# Altium PCB PCB1 - v1.2.PcbDoc
Units mm, origin at the board's own origin, x right, y up, seen from the top; angles counter-clockwise.
Board outline 84 x 99.75 mm, 2 copper layers (Top Layer, Bottom Layer), stack 1.671 mm thick; 21 components, 32 nets, 137 pads, 15 vias.
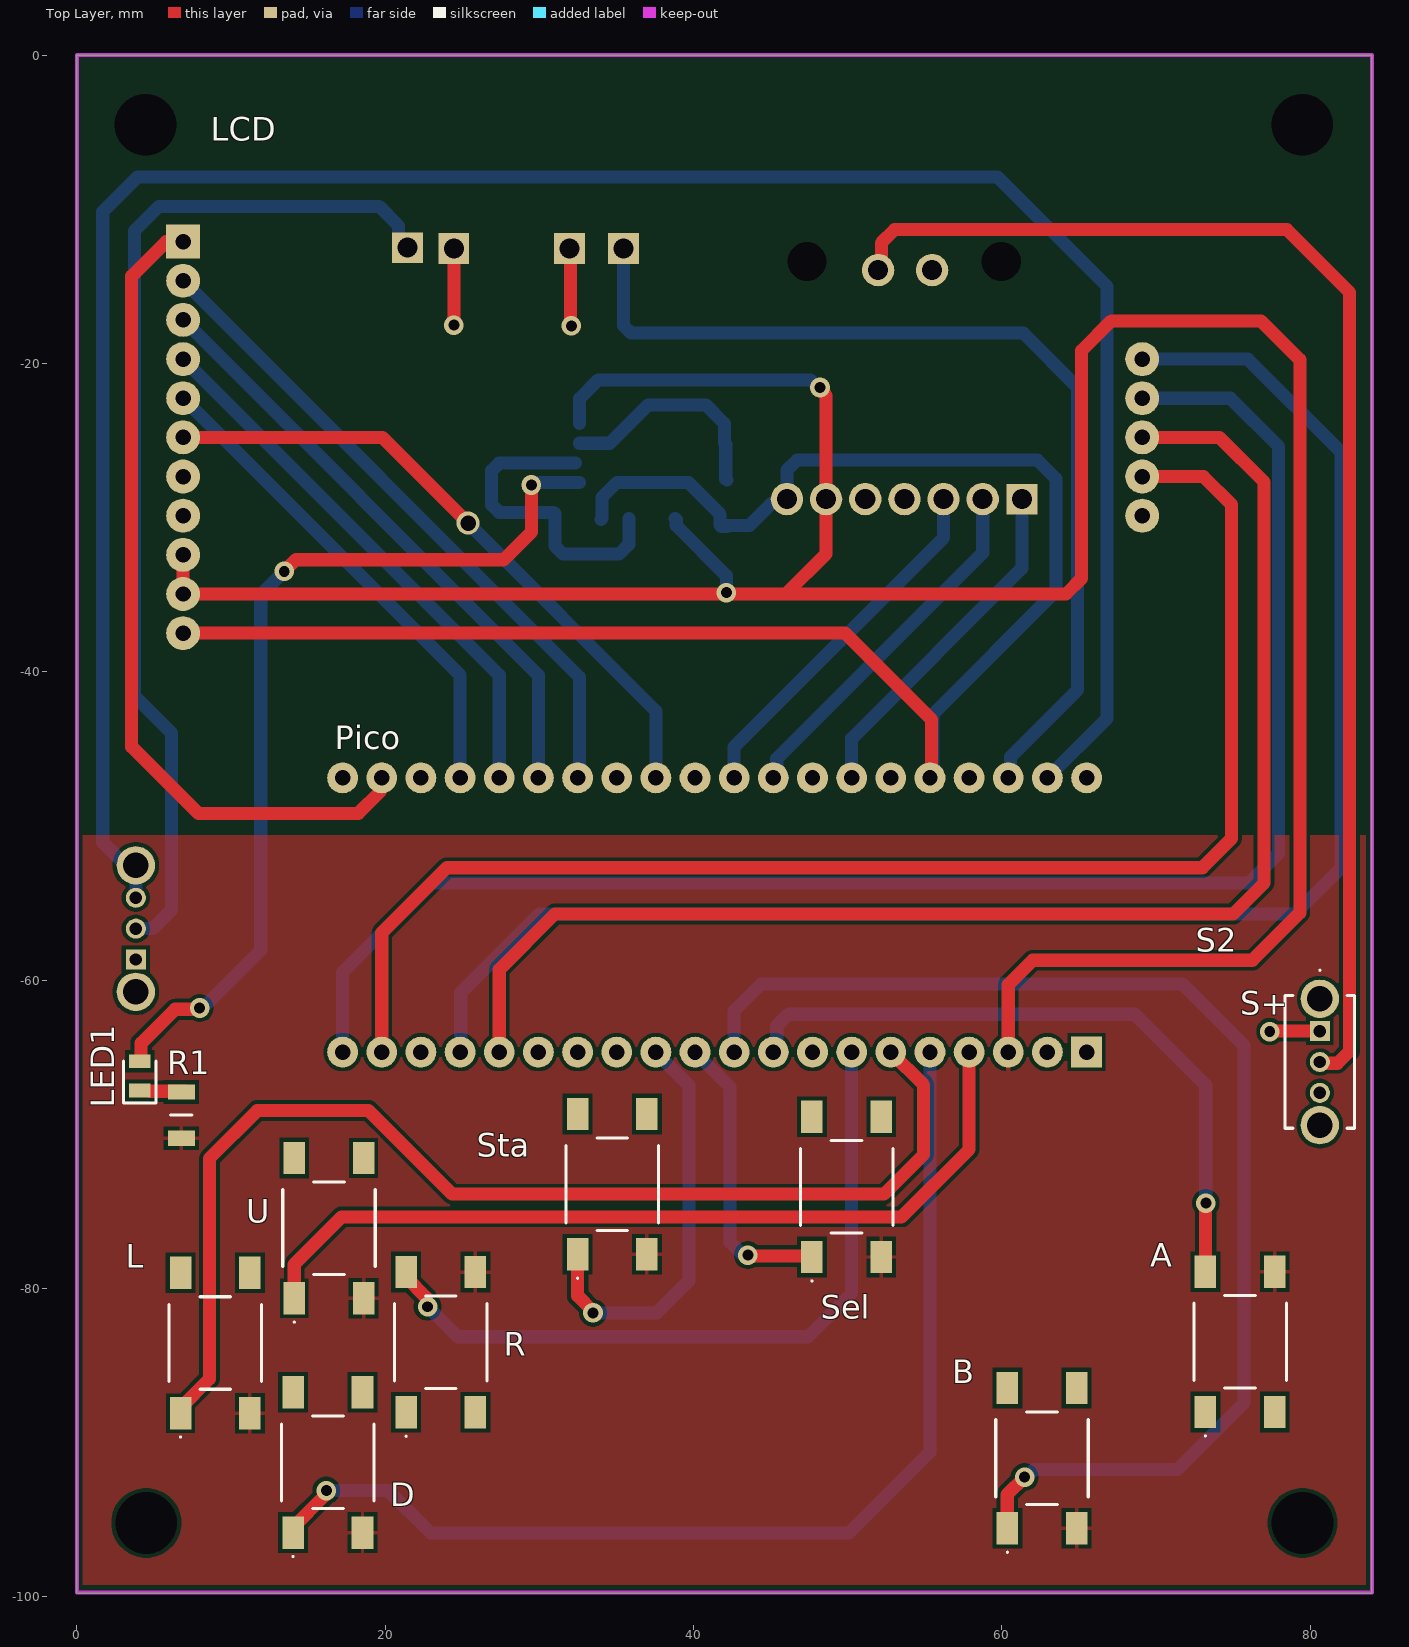
[diagram p0: Top Layer view]
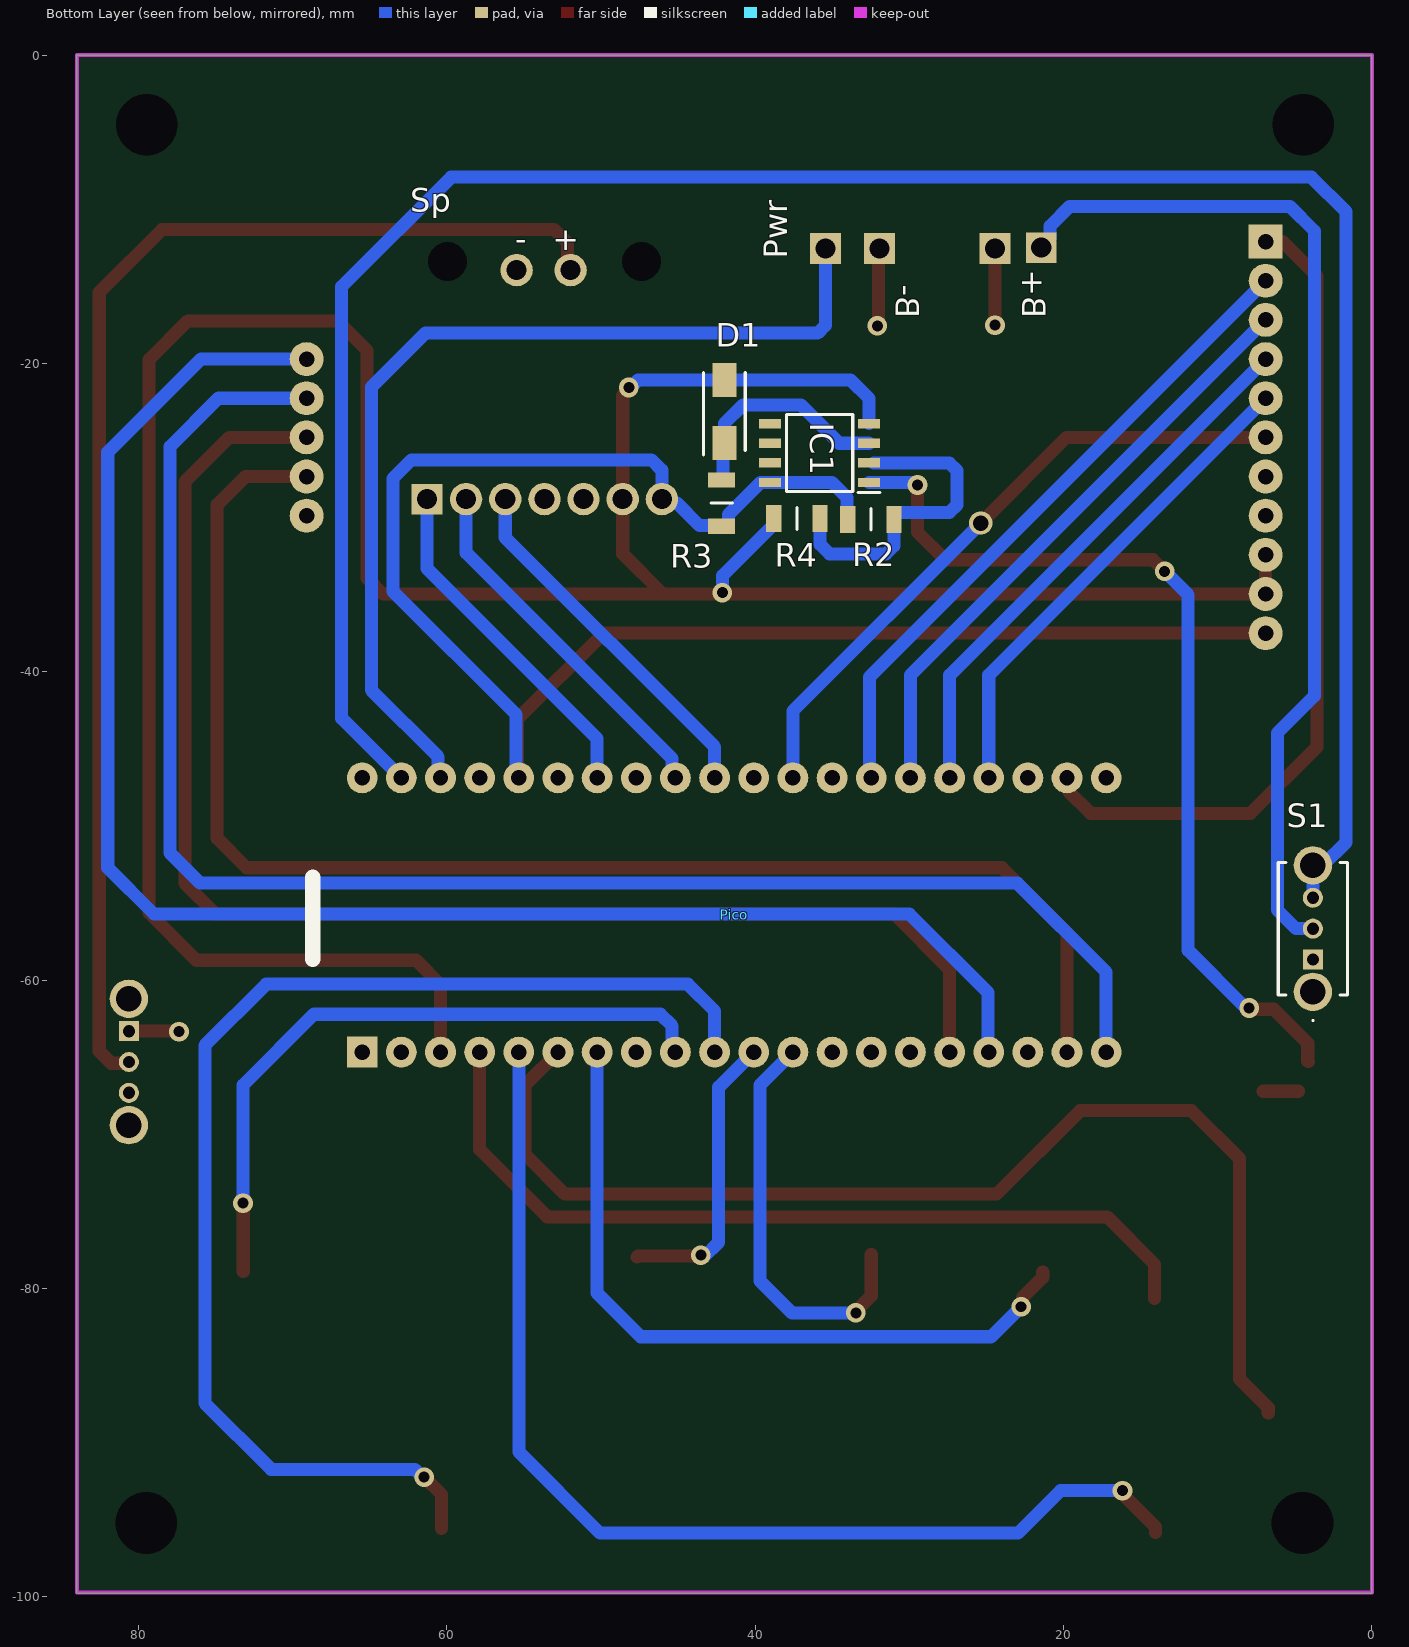
[diagram p1: Bottom Layer view, seen from below]

## Layer stack, top to bottom
Top Solder: solder mask 0.0102, Solder Resist, Dk 3.5
Top Layer: signal copper 0.0356
Dielectric 1: dielectric 1.6, FR-4, Dk 4.8
Bottom Layer: signal copper 0.0356
Bottom Solder: solder mask 0.0102, Solder Resist, Dk 3.5

## Board outline
0,-99.75 84,-99.75 84,0 0,0

## Design rules (kind name [scope] priority, off if disabled: settings)
Clearance [All] p1: gap=0.254 ignorepadtopadclearanceinfootprint=FALSE except(0: Arc-Hole Track-Hole SMDPad-Hole THPad-Hole Via-Hole Fill-Hole Poly-Hole Region-Hole Text-Hole)
PolygonConnect [All] p1: connectstyle=Relief reliefconductorwidth=0.254 reliefentries=4 polygonreliefangle="90 Angle" airgapwidth=0.254
RoutingVias [All] p1: holewidth=0.711 width=1.27 viastyle="Through Hole" minholewidth=0.711 minwidth=1.27 maxholewidth=0.711 maxwidth=1.27
SolderMaskExpansion [All] p1: expansion=0.102 istentingtop=FALSE
Width [All] p1: maxlimit=1.5 minlimit=0.254 preferedwidth=0.7 minimp=50.000000 maximp=50.000000 favimp=50.000000
30 further rules are at their usual default settings.

## Components (designator, comment, footprint, x,y, rotation, side; value= is the part's Value field where it differs from the comment)
A "TS04-66-75-BK-160-SMT" TS046675BK160SMT 75.45,-83.45 r90 top
B "TS04-66-75-BK-160-SMT" TS046675BK160SMT 62.6,-91 r90 top
D "TS04-66-75-BK-160-SMT" TS046675BK160SMT 16.275,-91.275 r90 top
D1 "3.3V" DIOM5027X244N 42,-23.1 r90 bottom
IC1 "NJM4580MD" SOIC127P680X200-8N 35.825,-25.8 r0 bottom
L "TS04-66-75-BK-160-SMT" TS046675BK160SMT 8.975,-83.525 r90 top
LCD "Screen 2.2 - Pins" "LCD 2.2''" 6.89,-12.085 r0 top locked
LED1 "150080SS75000" LEDC2012X80N 4.075,-66.2 r90 top
Pico "Pico - Pins" PICO 65.495,-64.655 r90 bottom locked
Pwr "Charging Module Pico" "Charging Module - Pico" 19.948,-13.981 r270 bottom (schematic designator PWR)
R "TS04-66-75-BK-160-SMT" TS046675BK160SMT 23.6,-83.475 r90 top
R1 "330" RESC3116X75N 6.773,-68.748 r90 top
R2 "3.3k" RESC3116X75N 32.5,-30.1 r0 bottom
R3 "330" RESC3116X75N 42.175,-29.05 r270 bottom
R4 "100k" RESC3116X75N 37.3,-30.05 r180 bottom
S1 "SLW-864547-5A-RA-D" SLW8645475ARAD 3.825,-58.65 r90 bottom
S2 "SLW-864547-5A-RA-D" SLW8645475ARAD 80.625,-63.3 r270 top
Sel "TS04-66-75-BK-160-SMT" TS046675BK160SMT 49.925,-73.4 r90 top
Sp "Sound module" "AUDIO MODULE" 53.625,-21.3 r180 bottom
Sta "TS04-66-75-BK-160-SMT" TS046675BK160SMT 34.725,-73.225 r90 top
U "TS04-66-75-BK-160-SMT" TS046675BK160SMT 16.35,-76.075 r90 top

## Footprints (in the part's own frame and the unit in brackets; to place one, negate y for a bottom-side part, rotate by r counter-clockwise, add the part's x,y. Pads: shape width x height; smd on the part's side, far side on the other; paste and mask are expansions set on the pad)
"AUDIO MODULE" [mm]
  rect 2x2 hole 1.3: 1(-7.671,-7.493)
  round 2.1 hole 1.3: 2(-5.131,-7.493) 3(-2.591,-7.493) 4(-0.051,-7.493) 5(2.489,-7.493) 6(5.029,-7.493) 7(7.569,-7.493) 8(1.65,7.362) 9(-1.849,7.362)
  round 1.524 hole 2.54 unplated: 9(-6.333,7.926) 9(6.256,7.926)
"Charging Module - Pico" [mm]
  rect 2x2 hole 1.3: 1(-1.499,-1.499) 2(-1.456,-4.499) 3(-1.456,-12.002) 4(-1.456,-15.502)
DIOM5027X244N [mm]
  rect 2.2x1.55 smd: 1(-2.05,0) 2(2.05,0)
  silkscreen extent -2.83,-1.35 2.52,1.35, body extent -2.52,-1.35 2.52,1.35, height 2.44
"LCD 2.2''" [mm]
  rect 2.2x2.2 hole 1: 1(0,0)
  round 2.2 hole 1: 2(0,-2.54) 3(0,-5.08) 4(0,-7.62) 5(0,-10.16) 6(0,-12.7) 7(0,-15.24) 8(0,-17.78) 9(0,-20.32) 10(0,-22.86) 11(0,-25.4) 12(62.21,-15.24) 13(62.21,-12.7) 14(62.21,-10.16) 15(62.21,-7.62) 16(62.21,-17.78)
LEDC2012X80N [mm]
  rect 0.9x1.4 smd: 1(-0.95,0) 2(0.95,0)
  silkscreen extent -1.75,-1.05 0.95,1.05, body extent -1.03,-0.63 0.97,0.63, height 0.7
PICO [mm]
  rect 2x2 hole 1: 1(0,0)
  round 2 hole 1: 2(0,-2.54) 3(0,-5.08) 4(0,-7.62) 5(0,-10.16) 6(0,-12.7) 7(0,-15.24) 8(0,-17.78) 9(0,-20.32) 10(0,-22.86) 11(0,-25.4) 12(0,-27.94) 13(0,-30.48) 14(0,-33.02) 15(0,-35.56) 16(0,-38.1) 17(0,-40.64) 18(0,-43.18) 19(0,-45.72) 20(0,-48.26) 21(17.78,-48.26) 22(17.78,-45.72) 23(17.78,-43.18) 24(17.78,-40.64) 25(17.78,-38.1) 26(17.78,-35.56) 27(17.78,-33.02) 28(17.78,-30.48) 29(17.78,-27.94) 30(17.78,-25.4) 31(17.78,-22.86) 32(17.78,-20.32) 33(17.78,-17.78) 34(17.78,-15.24) 35(17.78,-12.7) 36(17.78,-10.16) 37(17.78,-7.62) 38(17.78,-5.08) 39(17.78,-2.54) 40(17.78,0)
RESC3116X75N [mm]
  rect 1x1.75 smd: 1(-1.5,0) 2(1.5,0)
  silkscreen extent 0,-0.7 0,0.7, body extent -1.55,-0.8 1.55,0.8, height 0.75
SLW8645475ARAD [mm]
  rect 1.3x1.3 hole 0.8: 1(0,0)
  round 1.3 hole 0.8: 2(2,0) 3(4,0)
  round 2.49 hole 1.66: MH1(-2.1,0) MH2(6.1,0)
  silkscreen extent -4,-2.25 6.3,2.25, body extent -2.3,-7.25 6.3,2.25, height 4.8
SOIC127P680X200-8N [mm]
  rect 1.425x0.6 smd: 1(-3.212,1.905) 2(-3.212,0.635) 3(-3.212,-0.635) 4(-3.212,-1.905) 5(3.212,-1.905) 6(3.212,-0.635) 7(3.212,0.635) 8(3.212,1.905)
  silkscreen extent -3.93,-2.5 2.15,2.56, body extent -3.4,-2.5 3.4,2.5, height 2
TS046675BK160SMT [mm]
  rect 2.1x1.4 smd: 1(-4.55,2.25) 2(4.55,2.25) 3(-4.55,-2.25) 4(4.55,-2.25)
  silkscreen extent -6.15,-3 3,3

## Part data
A B D L R Sel Sta U: "Integrated Circuit", Manufacturer_Name="CUI Devices", Mouser Part Number=179-TS046675BK160SMT, Arrow Part Number=TS04-66-75-BK-160-SMT, Arrow Price/Stock=https://www.arrow.com/en/products/ts04-66-75-bk-160-smt/cui-devices?region=nac, Datasheet Link=https://www.mouser.es/ProductDetail/CUI-Devices/TS04-66-75-BK-160-SMT?qs=A6eO%252BMLsxmR5CIauYOve0Q%3D%3D, Height=7.8mm, Manufacturer_Part_Number=TS04-66-75-BK-160-SMT, Mouser Price/Stock=https://www.mouser.co.uk/ProductDetail/CUI-Devices/TS04-66-75-BK-160-SMT?qs=A6eO%252BMLsxmR5CIauYOve0Q%3D%3D
D1: library part 1SMA4734-AU_R1_000A1, "Diode", Manufacturer_Name=PANJIT, Mouser Part Number=241-1SMA4734AUR1000A, Datasheet Link=https://4donline.ihs.com/images/VipMasterIC/IC/PNJI/PNJI-S-A0006285883/PNJI-S-A0006285883-1.pdf?hkey=EF798316E3902B6ED9A73243A3159BB0, Height=2.44mm, Manufacturer_Part_Number=1SMA4734-AU_R1_000A1, Mouser Price/Stock=https://www.mouser.co.uk/ProductDetail/Panjit/1SMA4734-AU_R1_000A1?qs=sPbYRqrBIVlu785ZCL03Rg%3D%3D
IC1: "Integrated Circuit", Manufacturer_Name="New Japan Radio", Mouser Part Number=513-NJM4580MD, Height=2mm, Manufacturer_Part_Number=NJM4580MD, Mouser Price/Stock=https://www.mouser.co.uk/ProductDetail/NJR/NJM4580MD?qs=7jPOr0kCrUAwyBYhTVaFCw%3D%3D
LED1: "LED", Manufacturer_Name="Wurth Elektronik", Mouser Part Number=710-150080SS75000, Datasheet Link=https://katalog.we-online.com/led/datasheet/150080SS75000.pdf, Height=0.8mm, Manufacturer_Part_Number=150080SS75000, Mouser Price/Stock=https://www.mouser.co.uk/ProductDetail/Wurth-Elektronik/150080SS75000?qs=LlUlMxKIyB2zzpiaOzrUdw%3D%3D
R1 R2 R3 R4: library part RQ73C2B10KBTD, "Resistor", Manufacturer_Name="TE Connectivity", Mouser Part Number=279-RQ73C2B10KBTD, Datasheet Link=https://www.te.com/commerce/DocumentDelivery/DDEController?Action=showdoc&DocId=Data+Sheet%7F1773270-2%7FA%7Fpdf%7FEnglish%7FENG_DS_1773270-2_A.pdf%7F1-2176368-0, Height=0.75mm, Manufacturer_Part_Number=RQ73C2B10KBTD, Mouser Price/Stock=https://www.mouser.co.uk/ProductDetail/TE-Connectivity-Holsworthy/RQ73C2B10KBTD?qs=gZXFycFWdANWMnGuXdGmXg%3D%3D
S1 S2: "Switch", Manufacturer_Name="Same Sky", Mouser Part Number=179-SLW-864547-5ARAD, Arrow Part Number=SLW-864547-5A-RA-D, Arrow Price/Stock=null?region=nac, Datasheet Link=https://www.cuidevices.com/product/resource/slw-864547-5a-ra-d.pdf, Height=4.9mm, Manufacturer_Part_Number=SLW-864547-5A-RA-D, Mouser Price/Stock=https://www.mouser.co.uk/ProductDetail/CUI-Devices/SLW-864547-5A-RA-D?qs=1Kr7Jg1SGW%252Bn%2FarYZIP3WQ%3D%3D

## Free pads (board coordinates)
  round 1.524 hole 4 unplated: 10(4.45,-4.5) 10(4.5,-95.198) 10(79.475,-4.5) 10(79.5,-95.2)

## Via types
v1: diameter 1.27, hole 0.711, Top Layer to Bottom Layer, 14 vias
v2: diameter 1.5, hole 1, Top Layer to Bottom Layer, 1 vias

## Nets (pads, with @x,y where several pads share a name; then routed paths per layer and width w, separated by ;. In a path a pad name is that pad's centre, name@x,y a point inside that pad or via, vN(x,y) a via of type N, cw(c..) or ccw(c..) an arc to the next point about the centre after c; other vN are vias at no path point)
GND: A.4 B.3 D1.2 D.3 IC1.4 L.3 LCD.9 LCD.10 Pico.3 R1.1 R4.1 R.4 Sel.3 Sp.6 Sta.3 U.3 | length 191.3
  Top Layer w0.85: LCD.9 LCD.10 45.985,-34.945 ; v1(48.2,-21.55) 48.2,-21.664 48.596,-22.06 48.596,-32.334 45.985,-34.945 ; Pico.3@60.415,-64.08 60.415,-60.285 62,-58.7 76.25,-58.7 79.325,-55.625 79.325,-19.75 76.8,-17.225 67.1,-17.225 65.175,-19.15 65.175,-33.925 64.155,-34.945 45.985,-34.945
  Bottom Layer w0.85: IC1.4 32.613,-22.262 33.825,-21.05 47.586,-21.05 48.086,-21.55 v1(48.2,-21.55) ; R4.1 38.875,-30.125 38.875,-30.5 42.126,-33.751 v1(42.126,-34.849)
NetA_2: A.2 Pico.9 | length 44
  Top Layer w0.85: A.2 73.212,-78.888 73.212,-74.463 v1(73.225,-74.45)
  Bottom Layer w0.85: Pico.9 45.395,-64.435 45.395,-62.955 46.15,-62.2 68.625,-62.2 73.225,-66.8 v1(73.225,-74.45) v1@73.275,-74.5
NetB_1: B.1 Pico.10 | length 81.3
  Top Layer w0.85: B.1 60.35,-93.35 v1(61.475,-92.225)
  Bottom Layer w0.85: Pico.10 42.635,-61.99 44.375,-60.25 71.725,-60.25 75.7,-64.225 75.7,-87.425 71.4,-91.725 62.089,-91.725 61.589,-92.225 v1(61.475,-92.225)
NetD1_1: D1.1 IC1.3 R3.1 | length 14.7
  Bottom Layer w0.85: IC1.3 34.56,-25.165 37.05,-22.675 40.79,-22.675 42,-23.885 D1.1 42.087,-25.238 42.087,-27.475 42.162,-27.55 R3.1
NetD_1: D.1 Pico.5 | length 72
  Top Layer w0.85: D.1 14.025,-95.475 16.095,-93.405 16.095,-93.18 v1(16.175,-93.1)
  Bottom Layer w0.85: v1(16.175,-93.1) 20.2,-93.1 22.95,-95.85 50.075,-95.85 55.335,-90.59 Pico.5
NetGND_1: LCD.16
NetIC1_1: IC1.1 LED1.2 | length 60.2
  Top Layer w0.85: LED1.2@4.1,-65.275 4.114,-65.275 4.164,-65.225 4.164,-64.086 6.37,-61.88 7.882,-61.88 v1(7.963,-61.8) ; v1(13.45,-33.475) 14.2,-32.725 27.675,-32.725 29.475,-30.925 v1(29.475,-27.875)
  Bottom Layer w0.85: v1@7.75,-61.8 v1(7.963,-61.8) 8.175,-61.8 11.925,-58.05 11.925,-35 v1(13.45,-33.475) ; v1(29.475,-27.875) 29.645,-27.705 IC1.1
NetIC1_2: IC1.2 R2.1 R4.2 | length 21.2
  Bottom Layer w0.85: IC1.2@32.325,-26.45 27.398,-26.45 26.9,-26.948 26.9,-29.152 27.398,-29.65 30.925,-29.65 31,-29.725 31,-31.825 31.525,-32.35 35.175,-32.35 35.8,-31.725 R4.2
NetL_1: L.1 Pico.6 | length 75.8
  Top Layer w0.85: L.1 6.725,-87.725 8.6,-85.85 8.6,-71.55 11.7,-68.45 18.925,-68.45 24.35,-73.875 52.35,-73.875 54.925,-71.3 54.925,-66.785 Pico.6
NetLCD_1: LCD.1 Pico.22 | length 53.7
  Top Layer w0.85: LCD.1@5.79,-12.085 3.55,-14.325 3.55,-44.85 7.875,-49.175 18.25,-49.175 19.691,-47.734 19.691,-46.384 Pico.22@19.775,-46.3
NetLCD_2: LCD.2 Pico.27 | length 42.4
  Bottom Layer w0.85: LCD.2 32.6,-40.335 32.6,-46.175 Pico.27@32.475,-46.3
NetLCD_3: LCD.3 Pico.26 | length 38.7
  Bottom Layer w0.85: LCD.3 29.935,-40.21 Pico.26@29.935,-46.3
NetLCD_4: LCD.4 Pico.25 | length 35.1
  Bottom Layer w0.85: LCD.4 27.395,-40.21 Pico.25@27.395,-46.3
NetLCD_5: LCD.5 Pico.24 | length 31.5
  Bottom Layer w0.85: LCD.5 24.855,-40.21 Pico.24@24.855,-46.3
NetLCD_6: LCD.6 Pico.29 | length 41.8
  Top Layer w0.85: LCD.6 19.81,-24.785 v2(25.375,-30.35)
  Bottom Layer w0.85: v2(25.375,-30.35) 37.555,-42.53 Pico.29@37.555,-46.3
NetLCD_12: LCD.12 Pico.19 | length 93
  Top Layer w0.85: Pico.19@19.775,-64.08 19.775,-56.925 24,-52.7 73,-52.7 74.9,-50.8 74.9,-29.15 73.075,-27.325 LCD.12
NetLCD_13: LCD.13 Pico.16 | length 91.8
  Top Layer w0.85: Pico.16@27.395,-64.08 27.395,-59.305 31,-55.7 75,-55.7 77,-53.7 77,-27.675 74.11,-24.785 LCD.13
NetLCD_14: LCD.14 Pico.20 | length 105
  Bottom Layer w0.85: Pico.20@17.235,-64.08 17.235,-59.465 23,-53.7 76,-53.7 77.95,-51.75 77.95,-25.375 74.82,-22.245 LCD.14
NetLCD_15: LCD.15 Pico.17 | length 106.1
  Bottom Layer w0.85: Pico.17@24.855,-64.08 24.895,-64.04 24.895,-60.805 30,-55.7 79,-55.7 82,-52.7 82,-25.75 75.955,-19.705 LCD.15
NetLED1_1: LED1.1 R1.2 | length 2.3
  Top Layer w0.85: LED1.1@4.771,-67.198 R1.2@7.048,-67.198
NetPico_4: Pico.4 U.1 | length 55.4
  Top Layer w0.85: U.1 14.1,-78.425 17.175,-75.35 53.5,-75.35 57.875,-70.975 Pico.4
NetPico_7: Pico.7 R.2 | length 47.7
  Top Layer w0.85: R.2 21.35,-79.275 22.67,-80.595 22.67,-81.095 v1(22.75,-81.175)
  Bottom Layer w0.85: v1@22.95,-81.375 24.7,-83.125 47.425,-83.125 50.255,-80.295 Pico.7
NetPico_11: Pico.11 Sel.1 | length 18.8
  Top Layer w0.85: v1(43.525,-77.825) 43.587,-77.887 47.612,-77.887 Sel.1
  Bottom Layer w0.85: Pico.11 42.375,-66.935 42.375,-77 v1@43.325,-77.95
NetPico_12: Pico.12 Sta.1 | length 27
  Top Layer w0.85: Sta.1 32.475,-80.461 33.475,-81.461 v1(33.475,-81.575)
  Bottom Layer w0.85: v1(33.475,-81.575) 37.625,-81.575 39.7,-79.5 39.7,-66.8 Pico.12
NetPico_31: Pico.31 Sp.3 | length 23.7
  Bottom Layer w0.85: Pico.31 42.635,-44.865 56.216,-31.284 Sp.3
NetPico_32: Pico.32 Sp.2 | length 23.7
  Bottom Layer w0.85: Pico.32 45.395,-46.655 45.395,-45.63 58.756,-32.269 Sp.2
NetPico_34: Pico.34 Sp.1 | length 22.7
  Bottom Layer w0.85: Pico.34 50.255,-44.32 61.296,-33.279 Sp.1
NetPico_38: Pico.38 Pwr.4 | length 63.3
  Bottom Layer w0.85: Pwr.4 35.45,-17.525 35.95,-18.025 61.4,-18.025 64.9,-21.525 64.9,-41.175 60.566,-45.509 60.566,-46.724 Pico.38
NetPico_39: Pico.39 S1.3 S1.MH2 | length 147.6
  Bottom Layer w0.85: S1.MH2@3.175,-52.55 1.675,-51.05 1.675,-10.15 3.925,-7.9 59.725,-7.9 66.825,-15 66.825,-43.005 Pico.39 ; S1.3@3.825,-54.589 S1.MH2
NetPwr_1: Pwr.1 S1.2 | length 67.8
  Bottom Layer w0.85: S1.2 4.925,-56.65 6.125,-55.45 6.125,-43.95 3.725,-41.55 3.725,-11.4 5.325,-9.8 19.6,-9.8 20.872,-11.072 20.872,-11.907 Pwr.1
NetS2_2: S2.2 Sp.8 | length 86.5
  Top Layer w0.85: Sp.8@51.975,-14.497 52.178,-14.294 52.178,-12.172 53.05,-11.3 78.475,-11.3 82.549,-15.374 82.549,-64.605 81.769,-65.385 80.71,-65.385 S2.2 S2.2@80.747,-65.3
VCC: IC1.8 LCD.11 Pico.36 R2.2 R3.2 Sp.7 | length 113.2
  Top Layer w0.85: LCD.11 49.835,-37.485 55.425,-43.075 55.425,-46.21 Pico.36@55.335,-46.3
  Bottom Layer w0.85: R2.2 34.059,-30.041 34.059,-28.681 35.035,-27.705 39.655,-27.705 41.725,-29.775 41.725,-30.475 41.8,-30.55 R3.2 42.214,-30.511 43.614,-30.511 45.093,-29.032 45.817,-29.032 Sp.7 46.056,-26.919 46.725,-26.25 62.3,-26.25 63.5,-27.45 63.5,-34.775 55.514,-42.761 55.514,-46.696 Pico.36
pads on no net: A.1 A.3 B.2 B.4 D.2 D.4 IC1.5 IC1.6 IC1.7 L.2 L.4 LCD.7 LCD.8 Pico.1 Pico.2 Pico.8 Pico.13 Pico.14 Pico.15 Pico.18 Pico.21 Pico.23 Pico.28 Pico.30 Pico.33 Pico.35 Pico.37 Pico.40 Pwr.2 Pwr.3 R.1 R.3 S1.1 S1.MH1 S2.1 S2.3 S2.MH1 S2.MH2 Sel.2 Sel.4 Sp.4 Sp.5 Sp.9 Sta.2 Sta.4 U.2 U.4
copper on no net: | length 13.3
  Top Layer w0.85: 24.448,-12.525 24.449,-12.526 v1(24.45,-17.5) v1(24.45,-17.5) ; 31.95,-12.525 32.013,-12.587 32.013,-17.488 v1(32.075,-17.55) ; v1@77.35,-63.3 80.625,-63.3
  other v1: 77.375,-63.325

## Polygon pours and split planes (outlines as drawn)
GND on Top Layer "NONET_L-01_P-001" (solid, pour order 0): 0,-50.6 84,-50.6 84,-99.2 0,-99.2

## Keep-outs
Keep-Out Layer:
  lines w0.254: 0,-99.7 0,0.025 84,0.025 84,-99.7 0,-99.7

## Silkscreen, mask and mechanical layers (free items; w line width, h text height)
Top Overlay:
  text "S+" at 75.454,-62.221 h1.52
Bottom Overlay:
  lines w1: 68.7,-58.625 68.7,-53.325
  text "+" at 51.404,-12.65 h1.52
  text "-" at 54.829,-12.658 h1.52
  text "B+" at 22.671,-17.071 h1.52 r90
  text "B-" at 30.871,-17.071 h1.52 r90
Mechanical 1:
  lines w0.254: 6.775,-83.475 11.275,-83.475 ; 9.025,-86.725 9.025,-80.225 ; 14.075,-91.3 18.575,-91.3 ; 14.075,-76.15 18.575,-76.15 ; 16.325,-94.55 16.325,-88.05 ; 16.325,-79.4 16.325,-72.9 ; 21.375,-83.45 25.875,-83.45 ; 23.625,-86.7 23.625,-80.2 ; 32.4,-73.3 36.9,-73.3 ; 34.65,-76.55 34.65,-70.05 ; 47.65,-73.3 52.15,-73.3 ; 49.9,-76.55 49.9,-70.05 ; 60.35,-91.075 64.85,-91.075 ; 62.6,-94.325 62.6,-87.825 ; 73.025,-83.45 77.525,-83.45 ; 75.275,-86.7 75.275,-80.2 ; -0.05,-4.5 4.45,-4.5 4.45,0 -0.05,0 -0.05,-4.5 ; -0.001,11.3 3.999,11.3 3.999,15.3 -0.001,15.3 -0.001,11.3 ; 0,-99.698 0,-95.198 4.5,-95.198 4.5,-99.698 0,-99.698 ; 6.775,-86.725 6.775,-80.225 11.275,-80.225 11.275,-86.725 6.775,-86.725 ; 14.075,-94.55 18.575,-94.55 18.575,-88.05 14.075,-88.05 14.075,-94.55 ; 14.075,-79.4 18.575,-79.4 18.575,-72.9 14.075,-72.9 14.075,-79.4 ; 21.375,-86.7 25.875,-86.7 25.875,-80.2 21.375,-80.2 21.375,-86.7 ; 32.4,-76.55 32.4,-70.05 36.9,-70.05 36.9,-76.55 32.4,-76.55 ; 47.65,-76.55 47.65,-70.05 52.15,-70.05 52.15,-76.55 47.65,-76.55 ; 60.35,-94.325 64.85,-94.325 64.85,-87.825 60.35,-87.825 60.35,-94.325 ; 73.025,-86.7 77.525,-86.7 77.525,-80.2 73.025,-80.2 73.025,-86.7 ; 79.475,-4.5 79.475,0 83.975,0 83.975,-4.5 79.475,-4.5 ; 79.5,-99.7 84,-99.7 84,-95.2 79.5,-95.2 79.5,-99.7 ; 80,11.3 80,15.3 84,15.3 84,11.3 80,11.3

## Dimensions
14.075,-72.9 to 16.325,-94.55 on Mechanical 1
6.775,-83.475 to 25.875,-83.45 on Mechanical 1
9.89,-7.06 to 0,0.025 on Mechanical 13
9.89,-7.06 to 0,0.025 on Mechanical 13
14.075,-91.3 to 0,0 on Mechanical 1
16.325,-94.55 to 0,-99.75 on Mechanical 1
9.025,-86.725 to 0,-99.75 on Mechanical 1
23.625,-86.7 to 0,-99.75 on Mechanical 1
25.875,-83.45 to 0,0 on Mechanical 1
16.325,-72.9 to 0,-99.75 on Mechanical 1
14.075,-76.15 to 0,0 on Mechanical 1
34.65,-76.55 to 84,-99.75 on Mechanical 1
32.4,-73.3 to 84,0 on Mechanical 1
52.15,-73.3 to 84,0 on Mechanical 1
49.9,-70.05 to 84,-99.75 on Mechanical 1
60.35,-91.075 to 84,0 on Mechanical 1
73.025,-83.45 to 84,0 on Mechanical 1
75.275,-86.7 to 84,-99.75 on Mechanical 1
9.9,-6.975 to 0,0 on Mechanical 1
9.9,-6.975 to 0,0 on Mechanical 1
84,0 to 85,-128.7 on Mechanical 1
0,0 to 84,-2.7 on Mechanical 1